# EAGLE board Ubo_v1.6_led_topview (EAGLE 9.6.2), part 1 of 2
REV: B
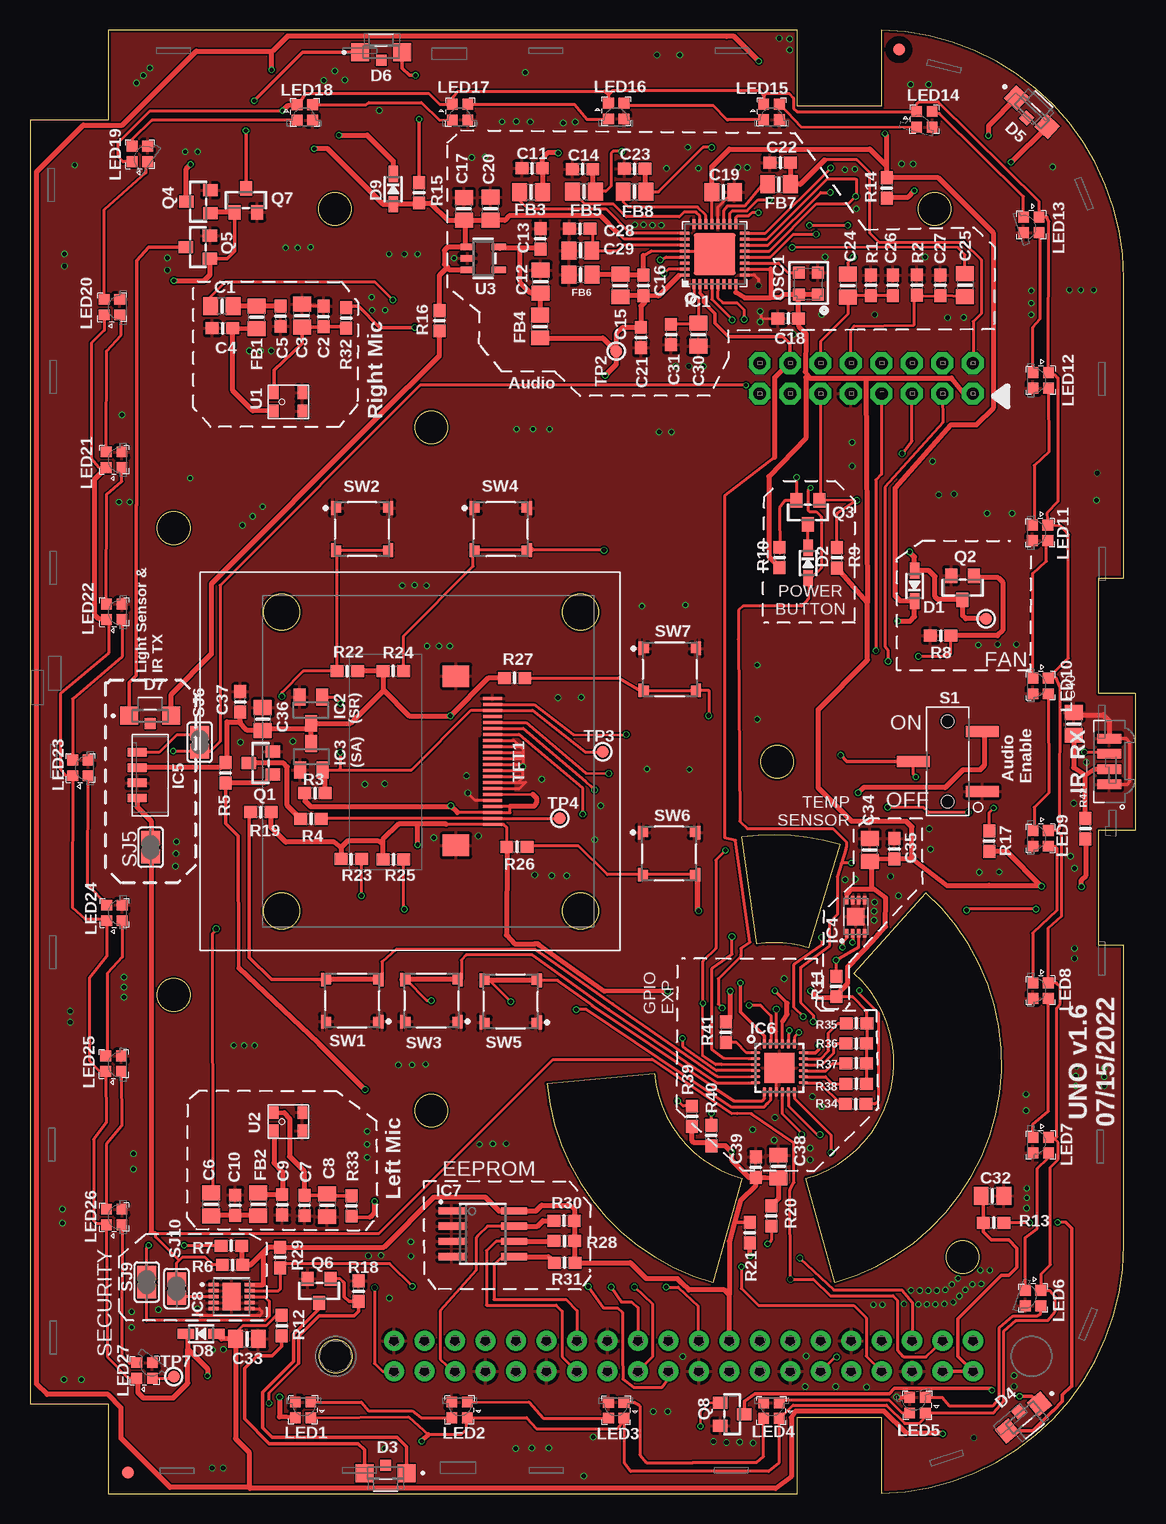
[diagram p0: board, top side]
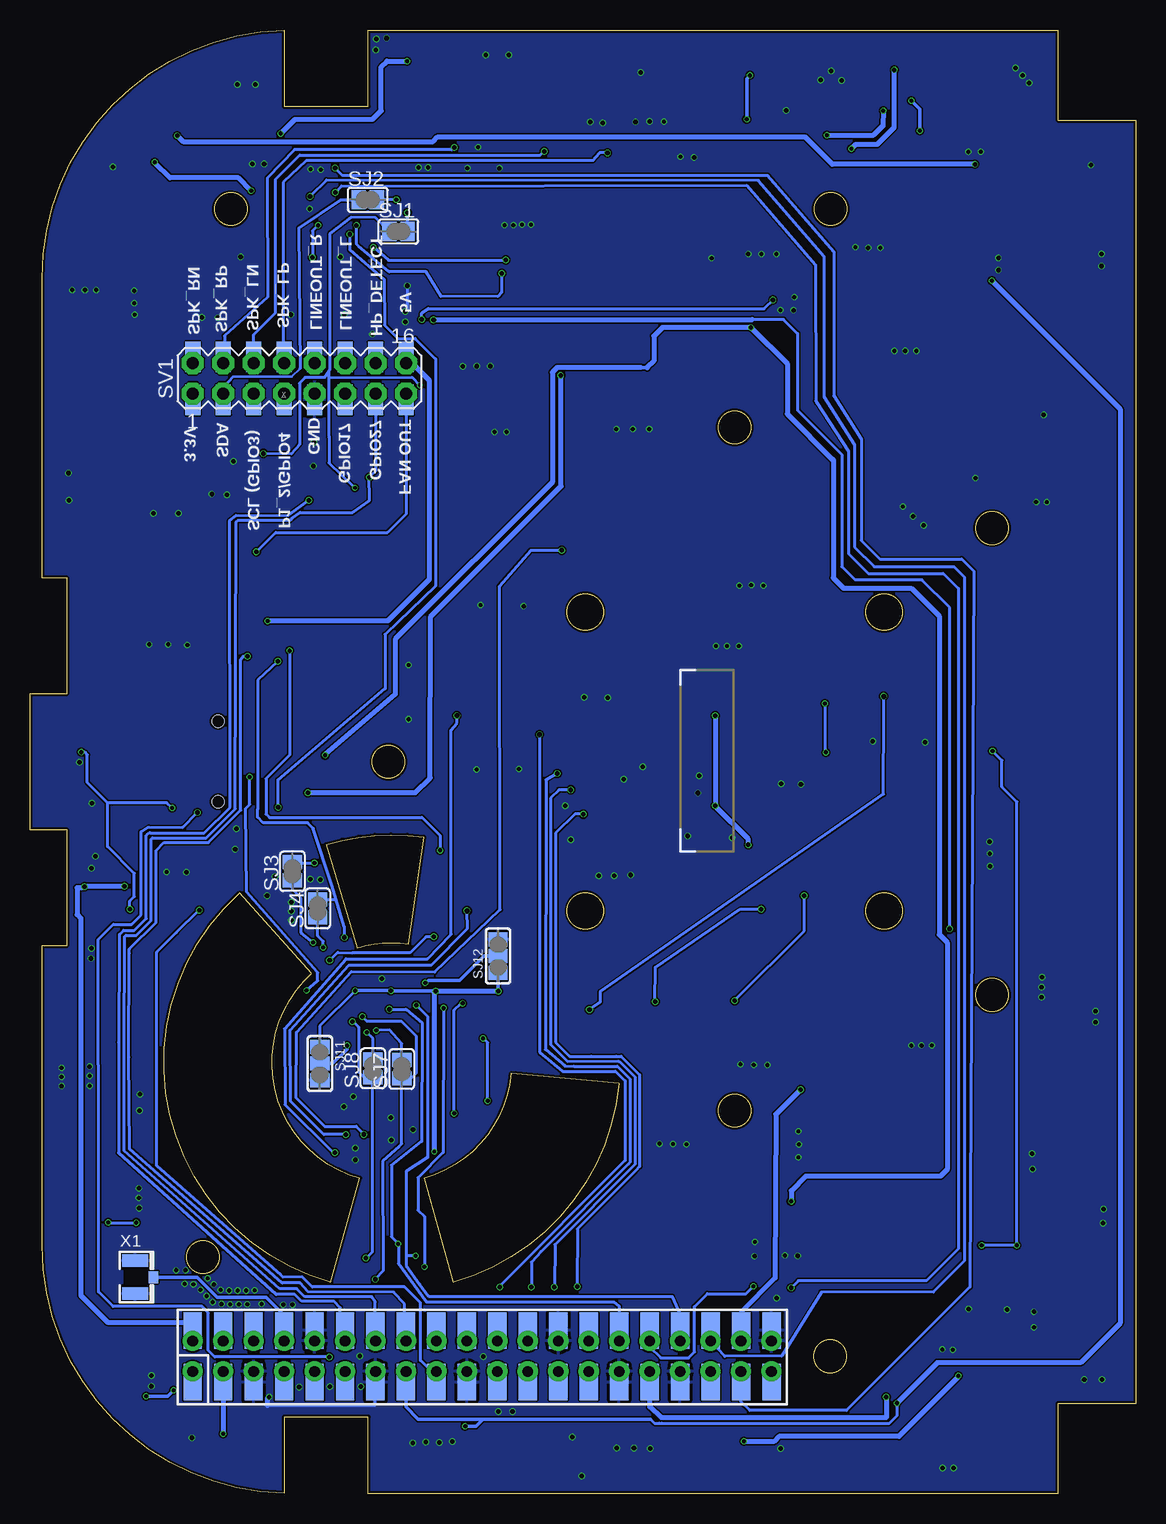
[diagram p1: board, bottom side, seen from below]

Size 92.19 x 122 mm. Coordinates in mm from the lower left corner, seen from the top.
Outline: 43.1,34.18 arc69 56.93,17.6 59.34,26.27 arc-69 52.06,35 43.1,34.18
Outline: 64.7,26.27 arc123 68.69,43.36 74.7,50.06 arc-123 67.11,17.6 64.7,26.27
Outline: 60.61,45.81 59.34,54.72 arc-25 67.5,54.1 64.91,45.48 arc25 60.61,45.81
Outline: 6.5,0 63.99,0 63.99,6.37 70.99,6.37 70.99,0.01 arc89 91.19,20.7 91.19,45.7 89.09,45.7 89.09,55.3 92.19,55.3 92.19,66.7 89.09,66.7 89.09,76.3 91.19,76.3 91.19,101.3 arc89 70.99,121.99 70.99,115.63 63.99,115.63 63.99,122 6.5,122 6.5,114.5 0,114.5 0,7.5 6.5,7.5 6.5,0
Outline: circle at 20.98,48.56 radius 1.5
Outline: circle at 20.98,73.48 radius 1.5
Outline: circle at 45.9,73.48 radius 1.5
Outline: circle at 25.43,107.07 radius 1.35
Outline: circle at 33.44,31.91 radius 1.35
Outline: circle at 11.98,41.56 radius 1.35
Outline: circle at 77.76,19.7 radius 1.35
Outline: circle at 62.3,61 radius 1.35
Outline: circle at 45.9,48.56 radius 1.5
Outline: circle at 33.44,88.88 radius 1.35
Outline: circle at 75.43,107.07 radius 1.35
Outline: circle at 11.98,80.48 radius 1.35
Outline: circle at 25.48,11.43 radius 1.36
Copper layers (1*16): Top 0.035mm / dielectric 1.6mm / Bottom 0.035mm
Design rules "jlcpcb-2layers *": minimum track width 5mil, minimum drill 0.3mm, track to track 5mil, track to pad 5mil, pad to pad 5mil, via to via 5mil, smd to smd 5mil, copper to edge 0.2mm, drill to drill 6mil, minimum pad ring 10mil, minimum via ring 3mil, stop-mask expansion 4mil, vias tented up to drill 0mil, thermal gap 10mil
Net classes: 1 power: width 0.406 mm; 2 i2c: width 0.203 mm

## Footprints (pad centres in the part's own frame; a part is rotated, then mirrored left to right if it is on the bottom)
0805-NO = smd 1.24 x 1.5: 1 -0.95,0; 2 0.95,0
0603-NO = smd 1.075 x 1: 1 -0.85,0; 2 0.85,0
SOD-323 = smd 1.35 x 0.8: A 1.27,0; C -1.27,0
DIO_VSMB10940 = smd 0.9 x 0.9: 1 0,-0.65 | smd 1.5 x 1.5: A 1.75,0; C -1.75,0
FIDUCIAL_1MM = smd 1 x 1: 1 0,0
QFN32_5MM = smd 0.8 x 0.25: 1 -2.5,1.75; 2 -2.5,1.25; 3 -2.5,0.75; 4 -2.5,0.25; 5 -2.5,-0.25; 6 -2.5,-0.75; 7 -2.5,-1.25; 8 -2.5,-1.75; 17 2.5,-1.75; 18 2.5,-1.25; 19 2.5,-0.75; 20 2.5,-0.25; 21 2.5,0.25; 22 2.5,0.75; 23 2.5,1.25; 24 2.5,1.75 | smd 0.25 x 0.8: 9 -1.75,-2.5; 10 -1.25,-2.5; 11 -0.75,-2.5; 12 -0.25,-2.5; 13 0.25,-2.5; 14 0.75,-2.5; 15 1.25,-2.5; 16 1.75,-2.5; 25 1.75,2.5; 26 1.25,2.5; 27 0.75,2.5; 28 0.25,2.5; 29 -0.25,2.5; 30 -0.75,2.5; 31 -1.25,2.5; 32 -1.75,2.5 | smd 3.5 x 3.5: 33 0,0
SOT23 = smd 1 x 1.4: 1 -0.95,-1.1; 2 0.95,-1.1; 3 0,1.1
SON127P600X800X80-9N = smd 0.699 x 0.254: P$1 -1.422,0.75; P$2 -1.422,0.25; P$3 -1.422,-0.25; P$4 -1.422,-0.75; P$5 1.333,-0.75; P$6 1.333,-0.25; P$7 1.333,0.25; P$8 1.333,0.75 | smd 1.473 x 1.473: P$9 -0.048,0
VEML7700 = smd 0.7 x 1.6: 1 -1.905,-1.1; 2 -0.635,-1.1; 3 0.635,-1.1; 4 1.905,-1.1
QFN24_4MM_SMSC = smd 0.8 x 0.28: 1 -2,1.25; 2 -2,0.75; 3 -2,0.25; 4 -2,-0.25; 5 -2,-0.75; 6 -2,-1.25; 13 2,-1.25; 14 2,-0.75; 15 2,-0.25; 16 2,0.25; 17 2,0.75; 18 2,1.25 | smd 0.28 x 0.8: 7 -1.25,-2; 8 -0.75,-2; 9 -0.25,-2; 10 0.25,-2; 11 0.75,-2; 12 1.25,-2; 19 1.25,2; 20 0.75,2; 21 0.25,2; 22 -0.25,2; 23 -0.75,2; 24 -1.25,2 | smd 2.5 x 2.5: THERM 0,0
SOIC127P600X175-8N = smd 2.2 x 0.6: 1 -2.6,1.905; 2 -2.6,0.635; 3 -2.6,-0.635; 4 -2.6,-1.905; 5 2.6,-1.905; 6 2.6,-0.635; 7 2.6,0.635; 8 2.6,1.905
SON50P300X300X60-11N = smd 0.9 x 0.27: 1 -1.5,1; 2 -1.5,0.5; 3 -1.5,0; 4 -1.5,-0.5; 5 -1.5,-1; 6 1.5,-1; 7 1.5,-0.5; 8 1.5,0; 9 1.5,0.5 | smd 0.91 x 0.27: 10 1.5,1 | smd 1.5 x 2.3: 11 0,0
TSMP77000 = smd 0.8 x 2: P$1 -1.905,0; P$2 -0.635,0; P$3 0.635,0; P$4 1.905,0
SK6805-EC15 = smd 0.9 x 0.9: P$1 -0.65,-0.65; P$2 0.65,-0.65; P$3 0.65,0.65; P$4 -0.65,0.65
OSC_2.5X2MM = smd 1 x 1: 1 -0.925,-0.8; 2 0.925,-0.8; 3 0.925,0.8; 4 -0.925,0.8
SOT23-WIDE = smd 1 x 1.2: 1 -0.95,-1; 2 0.95,-1; 3 0,1
PI_PIN_2X20_SMTTHM = drill 0.9 pad 1.676: 1 -23.38,-0.84; 2 -23.38,1.7; 3 -20.84,-0.84; 4 -20.84,1.7; 5 -18.3,-0.84; 6 -18.3,1.7; 7 -15.76,-0.84; 8 -15.76,1.7; 9 -13.22,-0.84; 10 -13.22,1.7; 11 -10.68,-0.84; 12 -10.68,1.7; 13 -8.14,-0.84; 14 -8.14,1.7; 15 -5.6,-0.84; 16 -5.6,1.7; 17 -3.06,-0.84; 18 -3.06,1.7; 19 -0.52,-0.84; 20 -0.52,1.7; 21 2.02,-0.84; 22 2.02,1.7; 23 4.56,-0.84; 24 4.56,1.7; 25 7.1,-0.84; 26 7.1,1.7; 27 9.64,-0.84; 28 9.64,1.7; 29 12.18,-0.84; 30 12.18,1.7; 31 14.72,-0.84; 32 14.72,1.7; 33 17.26,-0.84; 34 17.26,1.7; 35 19.8,-0.84; 36 19.8,1.7; 37 22.34,-0.84; 38 22.34,1.7; 39 24.88,-0.84; 40 24.88,1.7 | smd 1.524 x 3.048 bottom: S1 -23.38,-1.721; S2 -23.38,2.597; S3 -20.84,-1.721; S4 -20.84,2.597; S5 -18.3,-1.721; S6 -18.3,2.597; S7 -15.76,-1.721; S8 -15.76,2.597; S9 -13.22,-1.721; S10 -13.22,2.597; S11 -10.68,-1.721; S12 -10.68,2.597; S13 -8.14,-1.721; S14 -8.14,2.597; S15 -5.6,-1.721; S16 -5.6,2.597; S17 -3.06,-1.721; S18 -3.06,2.597; S19 -0.52,-1.721; S20 -0.52,2.597; S21 2.02,-1.721; S22 2.02,2.597; S23 4.56,-1.721; S24 4.56,2.597; S25 7.1,-1.721; S26 7.1,2.597; S27 9.64,-1.721; S28 9.64,2.597; S29 12.18,-1.721; S30 12.18,2.597; S31 14.72,-1.721; S32 14.72,2.597; S33 17.26,-1.721; S34 17.26,2.597; S35 19.8,-1.721; S36 19.8,2.597; S37 22.34,-1.721; S38 22.34,2.597; S39 24.88,-1.721; S40 24.88,2.597
SW_MS-12D17E = smd 0.9 x 2.75: 1 -2.5,-2.875; 2 0,2.875; 3 2.5,-2.875 | hole 1: 3.35,0; -3.35,0
SJ = smd 1.168 x 1.6: 1 -0.762,0; 2 0.762,0
SOLDERJUMPER_2WAY_OPEN_NOPASTE = smd 1.168 x 1.6: 1 -1.397,0; 2 0,0; 3 1.397,0
MA08-2 = drill 1.016 octagon: 1 -8.89,-1.27; 2 -8.89,1.27; 3 -6.35,-1.27; 4 -6.35,1.27; 5 -3.81,-1.27; 6 -3.81,1.27; 7 -1.27,-1.27; 8 -1.27,1.27; 9 1.27,-1.27; 10 1.27,1.27; 11 3.81,-1.27; 12 3.81,1.27; 13 6.35,-1.27; 14 6.35,1.27; 15 8.89,-1.27; 16 8.89,1.27 | smd 1.27 x 2.54: P$1 -8.89,-1.778; P$2 -8.89,1.778; P$3 -6.35,-1.778; P$4 -6.35,1.778; P$5 -3.81,-1.778; P$6 -3.81,1.778; P$7 -1.27,-1.778; P$8 -1.27,1.778; P$9 1.27,-1.778; P$10 1.27,1.778; P$11 3.81,-1.778; P$12 3.81,1.778; P$13 6.35,-1.778; P$14 6.35,1.778; P$15 8.89,-1.778; P$16 8.89,1.778
E-SWITCH_TL3315NF160Q_0 = smd 0.762 x 0.762: 1 -2.125,1.75; 2 2.125,1.75; 3 -2.125,-1.75; 4 2.125,-1.75 | smd 0.254 x 1.143: 1-2 -2.475,1.75; 2-2 2.475,1.75; 3-2 -2.475,-1.75; 4-2 2.475,-1.75
TFT_1.54IN_240X240_22PN_TOP_FPC = smd 0.25 x 1.6: 1 5.25,5.222; 2 4.75,5.222; 3 4.25,5.222; 4 3.75,5.222; 5 3.25,5.222; 6 2.75,5.222; 7 2.25,5.222; 8 1.75,5.222; 9 1.25,5.222; 10 0.75,5.222; 11 0.25,5.222; 12 -0.25,5.222; 13 -0.75,5.222; 14 -1.25,5.222; 15 -1.75,5.222; 16 -2.25,5.222; 17 -2.75,5.222; 18 -3.25,5.222; 19 -3.75,5.222; 20 -4.25,5.222; 21 -4.75,5.222; 22 -5.25,5.222 | smd 1.8 x 2.2: SUPPORT1 7,2.172; SUPPORT2 -7.1,2.172
TESTPOINT_ROUND_1MM = smd 1 x 1: P$1 0,0
SPW2430HR5H-B = smd 1.067 x 0.813: 1 -0.762,1.194; 2 -0.762,-1.168; 3 0.762,-1.168; 4 0.762,1.194
SOT23-5 = smd 0.55 x 1.2: 1 -0.95,-1.3; 2 0,-1.3; 3 0.95,-1.3; 4 0.95,1.3; 5 -0.95,1.3
U.FL = smd 2.2 x 1.05: 1 0,1.375; 2 0,-1.375 | smd 0.8 x 1: 3 1.525,0

## Placement (x,y rotation side)
C1  10uF  [0805-NO]  16,98.97 180 top
C2  0.1uF  [0603-NO]  24.46,98.12 90 top
C3  10uF  [0805-NO]  22.67,98.18 90 top
C4  33pF  [0603-NO]  16.05,97.13 180 top
C5  33pF  [0603-NO]  20.88,98.15 270 top
C6  10uF  [0805-NO]  15.1,24.1 90 top
C7  0.1uF  [0603-NO]  22.89,24.02 270 top
C8  10uF  [0805-NO]  24.77,24.03 270 top
C9  33pF  [0603-NO]  21.03,24.07 270 top
C10  33pF  [0603-NO]  17.11,24.03 90 top
C11  100pF  [0603-NO]  41.86,110.46 180 top
C12  10uF  [0805-NO]  42.58,101.03 90 top
C13  0.1uF  [0603-NO]  42.56,104.58 90 top
C14  100pF  [0603-NO]  46.06,110.4 180 top
C15  10uF  [0805-NO]  49.21,100.7 90 top
C16  0.1uF  [0603-NO]  51.14,100.7 90 top
C17  10uF  [0805-NO]  36.17,107.09 90 top
C18  0.1uF  [0603-NO]  63.22,97.94 180 top
C19  10uF  [0805-NO]  57.8,108.5 0 top
C20  10uF  [0805-NO]  38.39,107.1 90 top
C21  0.1uF  [0603-NO]  50.94,96.35 270 top
C22  100pF  [0603-NO]  62.55,110.93 180 top
C23  100pF  [0603-NO]  50.41,110.43 180 top
C24  47uF  [0805-NO]  68.17,100.69 270 top
C25  47uF  [0805-NO]  77.95,100.74 270 top
C26  100pF  [0603-NO]  71.93,100.71 90 top
C27  100pF  [0603-NO]  75.9,100.71 90 top
C28  0.1uF  [0603-NO]  45.83,105.42 180 top
C29  10uF  [0805-NO]  45.89,103.62 180 top
C30  10uF  [0805-NO]  55.71,96.61 270 top
C31  0.1uF  [0603-NO]  53.45,96.61 270 top
C32  10uF  [0805-NO]  80.24,24.8 0 top
C33  10uF  [0805-NO]  18.09,12.88 0 top
C34  10uF  [0805-NO]  70,53.64 90 top
C35  0.1uF  [0603-NO]  72.06,53.75 90 top
C36  10uF  [0805-NO]  19.41,64.57 90 top
C37  0.1uF  [0603-NO]  17.53,65.99 90 top
C38  10uF  [0805-NO]  62.41,27.25 90 top
C39  0.1uF  [0603-NO]  60.5,27.2 90 top
C40  10uF  [0805-NO]  87.02,64.16 90 top
D1  1N4148  [SOD-323]  73.75,75.67 90 top
D2  1N4148  [SOD-323]  64.87,77.57 270 top
D3  VSMB10940  [DIO_VSMB10940]  29.64,1.7 180 top
D4  VSMB10940  [DIO_VSMB10940]  82.82,6.34 220 top
D5  VSMB10940  [DIO_VSMB10940]  83.53,115.15 317 top
D6  VSMB10940  [DIO_VSMB10940]  29.29,120.13 0 top
D7  VSMB10940  [DIO_VSMB10940]  10.03,64.83 0 top
D8  1N4148  [SOD-323]  14.27,13.31 0 top
D9  1N4148  [SOD-323]  30.28,108.74 270 top
FB1  Ferrite  [0805-NO]  18.9,98.04 90 top
FB2  Ferrite  [0805-NO]  19.04,24.12 270 top
FB3  Ferrite  [0805-NO]  41.77,108.5 0 top
FB4  Ferrite  [0805-NO]  42.53,97.28 90 top
FB5  Ferrite  [0805-NO]  46.19,108.52 0 top
FB6  Ferrite  [0805-NO]  45.9,101.61 180 top
FB7  Ferrite  [0805-NO]  62.45,109.13 0 top
FB8  Ferrite  [0805-NO]  50.41,108.51 0 top
FID1  FIDUCIAL_1MM  [FIDUCIAL_1MM]  72.44,120.36 180 top
FID2  FIDUCIAL_1MM  [FIDUCIAL_1MM]  8.15,1.73 180 top
IC1  WM8960  [QFN32_5MM]  57.09,103.31 90 top
IC2  APX803-SAG  [SOT23]  23.42,65.3 180 top
IC3  APX803-SAG  [SOT23]  23.46,61.42 0 top
IC4  PCT2075D8-HWSON  [SON127P600X800X80-9N]  68.83,48.13 90 top
IC5  VEML7700  [VEML7700]  10.03,59.88 270 top
IC6  AW9523  [QFN24_4MM_SMSC]  62.48,35.5 0 top
IC7  CAT24C32WI-GT3  [SOIC127P600X175-8N]  37.76,21.65 0 top
IC8  SLS32AIA020X2USON10XTMA4  [SON50P300X300X60-11N]  16.81,16.41 0 top
IR1  [TSMP77000]  89.97,61.02 90 top
LED1  LC8812B-3210  [SK6805-EC15]  22.77,6.97 0 top
LED2  LC8812B-3210  [SK6805-EC15]  35.81,6.97 0 top
LED3  LC8812B-3210  [SK6805-EC15]  48.87,6.94 0 top
LED4  LC8812B-3210  [SK6805-EC15]  61.81,6.92 0 top
LED5  LC8812B-3210  [SK6805-EC15]  73.99,7.37 0 top
LED6  LC8812B-3210  [SK6805-EC15]  83.63,16.29 90 top
LED7  LC8812B-3210  [SK6805-EC15]  84.26,29.04 90 top
LED8  LC8812B-3210  [SK6805-EC15]  84.25,41.92 90 top
LED9  LC8812B-3210  [SK6805-EC15]  84.25,54.61 90 top
LED10  LC8812B-3210  [SK6805-EC15]  84.25,67.32 90 top
LED11  LC8812B-3210  [SK6805-EC15]  84.21,80.09 90 top
LED12  LC8812B-3210  [SK6805-EC15]  84.26,92.79 90 top
LED13  LC8812B-3210  [SK6805-EC15]  83.48,105.75 90 top
LED14  LC8812B-3210  [SK6805-EC15]  74.56,114.55 180 top
LED15  LC8812B-3210  [SK6805-EC15]  61.82,115.16 180 top
LED16  LC8812B-3210  [SK6805-EC15]  48.87,115.24 180 top
LED17  LC8812B-3210  [SK6805-EC15]  35.85,115.15 180 top
LED18  LC8812B-3210  [SK6805-EC15]  22.91,115.13 180 top
LED19  LC8812B-3210  [SK6805-EC15]  9.17,111.66 270 top
LED20  LC8812B-3210  [SK6805-EC15]  6.83,98.89 270 top
LED21  LC8812B-3210  [SK6805-EC15]  7.01,86.18 270 top
LED22  LC8812B-3210  [SK6805-EC15]  7.02,73.49 270 top
LED23  LC8812B-3210  [SK6805-EC15]  4.2,60.49 270 top
LED24  LC8812B-3210  [SK6805-EC15]  7.04,48.4 270 top
LED25  LC8812B-3210  [SK6805-EC15]  6.97,35.83 270 top
LED26  LC8812B-3210  [SK6805-EC15]  7.02,23.05 270 top
LED27  LC8812B-3210  [SK6805-EC15]  9.55,10.26 270 top
OSC1  ECS-3225MV  [OSC_2.5X2MM]  64.9,100.86 90 top
Q1  BSS138  [SOT23-WIDE]  19.24,60.88 90 top
Q2  BSS138  [SOT23-WIDE]  77.75,75.51 180 top
Q3  BSS138  [SOT23-WIDE]  64.85,81.79 180 top
Q4  BSS138  [SOT23-WIDE]  14.03,107.68 90 top
Q5  BSS138  [SOT23-WIDE]  14,103.9 90 top
Q6  BSS138  [SOT23-WIDE]  24.1,16.9 180 top
Q7  BSS138  [SOT23-WIDE]  18,107.8 0 top
Q8  BSS138  [SOT23-WIDE]  58.55,6.6 270 top
R1  10K  [0603-NO]  70.1,100.71 270 top
R2  10K  [0603-NO]  73.94,100.74 270 top
R3  10K  [0603-NO]  23.76,58.38 180 top
R4  20  [0603-NO]  23.42,56.24 0 top
R5  10K  [0603-NO]  16.31,60.07 90 top
R6  10K  [0603-NO]  16.89,19.05 180 top
R7  10K  [0603-NO]  16.79,20.65 180 top
R8  10K  [0603-NO]  75.92,71.51 180 top
R9  10K  [0603-NO]  67.28,78 90 top
R10  10K  [0603-NO]  62.48,78.03 90 top
R11  10K  [0603-NO]  67.22,42.27 90 top
R12  20  [0603-NO]  20.99,14 270 top
R13  20  [0603-NO]  80.34,22.58 0 top
R14  20  [0603-NO]  71.42,108.83 270 top
R15  20  [0603-NO]  32.44,108.43 90 top
R16  20  [0603-NO]  34.14,97.76 270 top
R17  10K  [0603-NO]  79.96,54.38 90 top
R18  10K  [0603-NO]  27.39,16.87 90 top
R19  10K  [0603-NO]  19.24,56.81 180 top
R20  10K  [0603-NO]  61.8,23.14 270 top
R21  10K  [0603-NO]  60.01,21.74 270 top
R22  10K  [0603-NO]  26.45,68.55 180 top
R23  10K  [0603-NO]  26.78,52.88 0 top
R24  10K  [0603-NO]  30.29,68.57 0 top
R25  10K  [0603-NO]  30.3,52.86 0 top
R26  10K  [0603-NO]  40.6,53.91 0 top
R27  10K  [0603-NO]  40.4,68 0 top
R28  3.9K  [0603-NO]  44.55,21.06 180 top
R29  10K  [0603-NO]  20.85,19.67 270 top
R30  10K  [0603-NO]  44.53,22.75 180 top
R31  3.9K  [0603-NO]  44.58,19.24 180 top
R32  20  [0603-NO]  26.37,97.99 90 top
R33  20  [0603-NO]  26.8,23.98 270 top
R34  10K  [0603-NO]  68.83,32.46 0 top
R35  10K  [0603-NO]  68.91,39.19 180 top
R36  10K  [0603-NO]  68.88,37.52 180 top
R37  10K  [0603-NO]  68.88,35.86 180 top
R38  10K  [0603-NO]  68.88,34.16 180 top
R39  10K  [0603-NO]  55.19,31.45 90 top
R40  10K  [0603-NO]  56.79,29.84 90 top
R41  10K  [0603-NO]  58.01,38.46 270 top
R42  20  [0603-NO]  87.99,55.42 90 top
RPI1  RASPBERRYPI_BPLUS_PIN_2X20_SMTTHM  [PI_PIN_2X20_SMTTHM]  55.24,11.87 180 top
S1  JS102011JCQNMS-12D17E  [SW_MS-12D17E]  76.5,61.02 90 top
SJ1  [SJ]  61.47,105.21 0 bottom
SJ2  [SJ]  64.03,107.85 0 bottom
SJ3  [SJ]  70.31,51.87 90 bottom
SJ4  [SJ]  68.2,48.77 90 bottom
SJ5  [SJ]  10.06,53.87 90 top
SJ6  [SJ]  14.15,62.64 90 top
SJ7  [SJ]  61.19,35.38 90 bottom
SJ8  [SJ]  63.6,35.43 90 bottom
SJ9  [SJ]  9.73,17.63 270 top
SJ10  [SJ]  12.22,17.09 270 top
SJ11  [SOLDERJUMPER_2WAY_OPEN_NOPASTE]  68.02,35.84 270 bottom
SJ12  [SOLDERJUMPER_2WAY_OPEN_NOPASTE]  53.16,44.81 90 bottom
SV1  [MA08-2]  69.72,92.96 0 bottom
SW1  [E-SWITCH_TL3315NF160Q_0]  26.86,41.08 180 top
SW2  [E-SWITCH_TL3315NF160Q_0]  27.69,80.39 0 top
SW3  [E-SWITCH_TL3315NF160Q_0]  33.46,41.08 180 top
SW4  [E-SWITCH_TL3315NF160Q_0]  39.24,80.39 0 top
SW5  [E-SWITCH_TL3315NF160Q_0]  40.07,41.02 180 top
SW6  [E-SWITCH_TL3315NF160Q_0]  53.28,53.34 0 top
SW7  [E-SWITCH_TL3315NF160Q_0]  53.34,68.71 0 top
TFT1  DISP_TFT_1.54IN_240X240_22P_TOP_FPC  [TFT_1.54IN_240X240_22PN_TOP_FPC]  33.34,61.04 270 top
TP2  [TESTPOINT_ROUND_1MM]  48.87,95.22 0 top
TP3  [TESTPOINT_ROUND_1MM]  47.75,61.82 0 top
TP4  [TESTPOINT_ROUND_1MM]  44.17,56.29 0 top
TP6  [TESTPOINT_ROUND_1MM]  79.71,72.92 180 top
TP7  [TESTPOINT_ROUND_1MM]  11.99,9.75 0 top
U1  MIC  [SPW2430HR5H-B]  21.54,91.01 90 top
U2  MIC  [SPW2430HR5H-B]  21.54,30.99 90 top
U3  AP2112-3.3K  [SOT23-5]  37.78,102.96 270 top
X1  [U.FL]  83.41,18.03 0 bottom

## Library data of the parts
C1-C40 FB1-FB8 IC2 IR1 LED1-LED27 OSC1 Q1-Q8 R1-R42 RPI1 S1 SJ1-SJ12 TFT1 TP2-TP4 TP6 TP7 = Uno
D1 D2 D8 D9 = Uno; PURCHASE_URL: https://www.digikey.com/en/products/detail/diodes-incorporated/ZLLS410TA/1767180
D3-D7 = Uno; AVAILABILITY: Warning; DESCRIPTION: LED IrLED 940nm 2-Pin SMD T/R; MF: Vishay Semiconductor; MP: VSMB10940; PACKAGE: SMD-2 Vishay; PRICE: None; PURCHASE-URL: https://www.digikey.com/en/products/detail/vishay-semiconductor-opto-division/VSMB10940/3915199
FID1 FID2 = Uno; BOM: EXCLUDE
IC1 = Uno; AVAILABILITY: low; DATASHEET: https://statics.cirrus.com/pubs/proDatasheet/WM8960_v4.4.pdf; DIGIKEY_PART_NUMBER: 598-WM8960CGEFL/V-ND; MF: Cirrus Logic Inc.; MFN: WM8960CGEFL/V; PACKAGE: 32-VFQFN Exposed Pad; PRICE: 0.9; PURCHASE_URL: https://www.digikey.com/en/products/detail/cirrus-logic-inc/WM8960CGEFL-V/5036712; ROHS: yes; TEMPERATURE_RANGE_HIGH: 85°C; TEMPERATURE_RANGE_LOW: -40°C
IC3 = Uno; AVAILABILITY: medium; DATASHEET: https://www.diodes.com/assets/Datasheets/APX803S.pdf; DIGIKEY_PART_NUMBER: APX803S00-29SR-7DIDKR-ND; MF: Diodes Incorporated; MPN: APX803S00-29SR-7; PACKAGE: SOT-23-3; PRICE: 0.10; PURCHASE-URL: https://www.digikey.com/en/products/detail/diodes-incorporated/APX803S00-29SR-7/6674547; ROHS: yes
IC4 = Uno; AVAILABILITY: medium; DATASHEET: https://www.nxp.com/docs/en/data-sheet/PCT2075.pdf; DIGIKEY_PART_NUMBER: 568-10220-6-ND; MF: NXP USA Inc.; MFN: PCT2075TP,147; PACKAGE: 8HWSON; PURCHASE_URL: https://www.digikey.com/en/products/detail/PCT2075TP%2c147/568-10220-1-ND/3991876?itemSeq=362201509; ROHS: yes; TEMPERATURE_RANGE_HIGH: 125°C; TEMPERATURE_RANGE_LOW: -55°C
IC5 = Uno; DATASHEET: https://www.nxp.com/docs/en/data-sheet/PCT2075.pdf; DIGIKEY_PART_NUMBER: VEML7700DKR-ND; MF: Vishay; MPN: VEML7700-TR; PACKAGE: 4-SMD; PRICE: 0.4; PURCHASE-URL: https://www.digikey.com/en/products/detail/vishay-semiconductor-opto-division/VEML7700-TR/5820243; ROHS: yes; TEMPERATURE_RANGE_HIGH: 85°C; TEMPERATURE_RANGE_LOW: -25°C
IC6 = Uno; AVAILABILITY: warning; DATASHEET: https://datasheet.lcsc.com/lcsc/1809192237_AWINIC-Shanghai-Awinic-Tech-AW9523BTQR_C148077.pdf; MF: AWINIC(Shanghai Awinic Tech); MFN: AW9523BTQR; PACKAGE: TQFN-24; PRICE: 0.3; PURCHASE_LINK: https://lcsc.com/product-detail/Interface-I-O-Expanders_AWINIC-Shanghai-Awinic-Tech-AW9523BTQR_C148077.html; TEMPERATURE_RANGE_HIGH: 85℃; TEMPERATURE_RANGE_LOW: -40℃
IC7 = Uno; AVAILABILITY: Good; DATASHEET: https://www.onsemi.com/pdf/datasheet/cat24c32-d.pdf; DESCRIPTION: EEPROM Memory IC 32Kb (4K x 8) I²C 1MHz 400ns 8-SOIC; DIGIKEY_PART_NUMBER: CAT24C32WI-GT3DKR-ND; MF: ON; MPN: CAT24C32WI-GT3; PACKAGE: SOIC-8 ON; PRICE: 0.1; PURCHASE-URL: https://www.digikey.com/en/products/detail/on-semiconductor/CAT24C32WI-GT3/1631159; ROHS: yes; SPICEPREFIX: X; TEMPERATURE_RANGE_HIGH: 85°C; TEMPERATURE_RANGE_LOW: -40°C
IC8 = Uno; AVAILABILITY: Good; DESCRIPTION: High-end security controller | Turnkey solution | One-way authentication using ECDSA | Mutual authentication using DTLS client (IETF standard RFC 6347) | Secure communication using DTLS | Compliant with the USB Type-C Authentication standard | I2C interface | Up to 10 KB user memory | Cryptographic support: ECC256, AES128, SHA-256, TRNG, DRNG | PG-USON-10-2 package (3 x 3 mm) | Standard & extended temperature ranges | Full system integration support | Common Criteria Certified EAL6+ (high) hardware | Cryptographic Tool Box based on ECC NIST P256, P384 and SHA256 (sign, verify, key generation, ECDH, session key derivation); MF: Infineon Technologies; MP: SLS32AIA020X2USON10XTMA4; PACKAGE: UFDFN-10 Infineon Technologies; PRICE: None; PURCHASE-URL: https://pricing.snapeda.com/search/part/SLS32AIA020X2USON10XTMA4/?ref=eda
SV1 = Uno; OC_FARNELL: unknown; OC_NEWARK: unknown
SW1-SW7 = Uno; CENTROID_NOT_SPECIFIED: No; DATASHEET: http://media.digikey.com/pdf/Data%20Sheets/E-Switch%20PDFs/TL3315.pdf; DIGIKEY_PART_NUMBER: EG4621CT-ND; MF: E-Switch; MOUSER_PART_NUMBER: 612-TL3315NF160Q; MPN: TL3315NF160Q; PACKAGE: SW_SMT_4MM5_4MM5; PREFIX: SW; PRICE: 0.02; PURCHASE-URL: https://www.digikey.sg/product-detail/en/e-switch/TL3315NF160Q/EG4621CT-ND/1870401; ROHS: yes; TEMPERATURE_RANGE_HIGH: +70°C; TEMPERATURE_RANGE_LOW: -20°C
U1 U2 = Uno; AVAILABILITY: good; DATASHEET: https://www.knowles.com/docs/default-source/model-downloads/spw2430hr5h-b.pdf; DIGIKEY_PART_NUMBER: 423-1394-2-ND; MN: Knowles; MPN: SPW2430HR5H-B; PRICE: 0.25; PURCHASE-URL: https://www.digikey.com/en/products/detail/knowles/SPW2430HR5H-B/5052768; ROHS: yes
U3 = Uno; DIGIKEY_PART_NUMBER: MCP1824T-3302E/OTCT-ND
X1 = adafruit

## Nets
3.3V: C18.1 C34.1 C35.1 C36.1 C37.1 C38.1 C39.1 IC1.8 IC1.10 IC2.3 IC3.3 IC4.P$8 IC5.2 IC6.21 IC7.8 IC8.10 OSC1.1 OSC1.4 R3.2 R5.2 R6.1 R7.1 R9.1 R10.1 R11.1 R17.1 R19.1 R20.1 R21.1 R22.1 R23.1 R24.1 R25.1 R26.1 R27.1 R28.1 R29.1 R30.1 R31.1 R35.1 R36.1 R37.1 R38.1 R39.1 R40.1 R41.1 R42.1 RPI1.1 RPI1.17 RPI1.S1 RPI1.S17 SJ11.1 SJ12.1 SV1.1 SV1.P$1 TFT1.1 TFT1.3 TFT1.4 TFT1.6
5.0V: C17.1 C19.1 C20.1 C32.1 C33.1 D1.C D8.A D9.A IC1.21 IC1.26 R12.1 R13.1 R14.1 R15.1 R16.1 RPI1.2 RPI1.4 RPI1.S2 RPI1.S4 SV1.16 SV1.P$16 U3.1 U3.3
AGND: C15.2 C16.2 FB6.1 IC1.28 IC1.33
AVDD: C15.1 C16.1 C21.1 FB4.1 IC1.32 S1.3 TP2.P$1
AVDD_EN: R32.2 R33.2 R34.2 S1.2
BUTTON_E_DOWN: IC6.10 R24.2 SW4.3 SW4.3-2 SW4.4 SW4.4-2
BUTTON_E_UP: IC6.8 R22.2 SW2.3 SW2.3-2 SW2.4 SW2.4-2
BUTTON_S_LEFT: IC6.11 R26.2 SW6.3 SW6.3-2 SW6.4 SW6.4-2
BUTTON_S_RIGHT: IC6.12 R27.2 SW7.3 SW7.3-2 SW7.4 SW7.4-2
BUTTON_W_DOWN: IC6.7 R25.2 SW5.3 SW5.3-2 SW5.4 SW5.4-2
BUTTON_W_MIDDLE: IC6.6 R23.2 SW3.3 SW3.3-2 SW3.4 SW3.4-2
BUTTON_W_UP: IC6.5 R19.2 SW1.3 SW1.3-2 SW1.4 SW1.4-2
EECLK: IC7.6 R28.2 RPI1.28 RPI1.S28
EEDATA: IC7.5 R31.2 RPI1.27 RPI1.S27
EEPROM_WP: IC7.7 R30.2 RPI1.36 RPI1.S36
FAN_IN: Q2.1 R8.1 RPI1.15 RPI1.S15
FAN_OUT: D1.A Q2.3 SV1.15 SV1.P$15 TP6.P$1
GND: C2.2 C3.2 C4.2 C5.2 C7.2 C8.2 C9.2 C10.2 C11.2 C12.2 C13.2 C14.2 C17.2 C18.2 C19.2 C20.2 C21.2 C22.2 C23.2 C26.2 C27.2 C28.2 C29.2 C30.2 C31.2 C32.2 C33.2 C34.2 C35.2 C36.2 C37.2 C38.2 C39.2 C40.2 FB6.2 IC1.9 IC1.20 IC1.24 IC2.2 IC3.1 IC4.P$4 IC4.P$5 IC4.P$6 IC4.P$7 IC4.P$9 IC5.3 IC6.9 IC6.THERM IC7.1 IC7.2 IC7.3 IC7.4 IC8.1 IC8.2 IC8.4 IC8.5 IC8.6 IC8.7 IC8.11 IR1.P$1 IR1.P$4 LED1.P$4 LED2.P$4 LED3.P$4 LED4.P$4 LED5.P$4 LED6.P$4 LED7.P$4 LED8.P$4 LED9.P$4 LED10.P$4 LED11.P$4 LED12.P$4 LED13.P$4 LED14.P$4 LED15.P$4 LED16.P$4 LED17.P$4 LED18.P$4 LED19.P$4 LED20.P$4 LED21.P$4 LED22.P$4 LED23.P$4 LED24.P$4 LED25.P$4 LED26.P$4 LED27.P$4 OSC1.2 Q1.2 Q2.2 Q4.2 Q5.2 Q6.2 Q7.2 Q8.2 R1.1 R2.1 R8.2 R18.2 RPI1.6 RPI1.9 RPI1.14 RPI1.20 RPI1.25 RPI1.30 RPI1.34 RPI1.39 RPI1.S6 RPI1.S9 RPI1.S14 RPI1.S20 RPI1.S25 RPI1.S30 RPI1.S34 RPI1.S39 S1.1 SJ11.3 SJ12.3 SV1.9 SV1.P$9 SW1.1 SW1.1-2 SW1.2 SW1.2-2 SW2.1 SW2.1-2 SW2.2 SW2.2-2 SW3.1 SW3.1-2 SW3.2 SW3.2-2 SW4.1 SW4.1-2 SW4.2 SW4.2-2 SW5.1 SW5.1-2 SW5.2 SW5.2-2 SW6.1 SW6.1-2 SW6.2 SW6.2-2 SW7.1 SW7.1-2 SW7.2 SW7.2-2 TFT1.5 TFT1.7 TFT1.8 TFT1.9 TFT1.10 TFT1.11 TFT1.12 TFT1.13 TFT1.14 TFT1.15 TFT1.22 TFT1.SUPPORT1 TFT1.SUPPORT2 U1.2 U1.3 U2.2 U2.3 U3.2 X1.1 X1.2
GPIO4: RPI1.7 RPI1.S7 X1.3
GPIO17: Q3.1 R9.2 RPI1.11 RPI1.S11 SV1.11 SV1.P$11
GPIO27: Q3.2 R10.2 RPI1.13 RPI1.S13 SV1.13 SV1.P$13
GPIO_15: RPI1.10 RPI1.S10
GPIO_EXP_RST: IC6.23 R21.2 RPI1.33 RPI1.S33
HEADPHONE_DETECT: IC1.2 RPI1.8 RPI1.S8 SV1.14 SV1.P$14
I2S_BCLK: IC1.12 RPI1.12 RPI1.S12
I2S_DIN: IC1.16 RPI1.38 RPI1.S38
I2S_DOUT: IC1.14 RPI1.40 RPI1.S40
I2S_LRCLK: IC1.13 IC1.15 RPI1.35 RPI1.S35
INT: IC6.22 R20.2 RPI1.29 RPI1.S29
IR_RX: IR1.P$3 R17.2 RPI1.18 RPI1.S18
IR_TX: Q4.1 Q5.1 Q6.1 Q7.1 Q8.1 R18.1 RPI1.16 RPI1.S16
LED_POWER: D8.C D9.C LED1.P$2 LED2.P$2 LED3.P$2 LED4.P$2 LED5.P$2 LED6.P$2 LED7.P$2 LED8.P$2 LED9.P$2 LED10.P$2 LED11.P$2 LED12.P$2 LED13.P$2 LED14.P$2 LED15.P$2 LED16.P$2 LED17.P$2 LED18.P$2 LED19.P$2 LED20.P$2 LED21.P$2 LED22.P$2 LED23.P$2 LED24.P$2 LED25.P$2 LED26.P$2 LED27.P$2
LED_PWM0: LED1.P$1 RPI1.32 RPI1.S32
LEDK: R4.2 TFT1.2 TP4.P$1
LINEOUT_LEFT: C24.2 C26.1 R1.2 SV1.12 SV1.P$12
LINEOUT_RIGHT: C25.2 C27.1 R2.2 SV1.10 SV1.P$10
LINPUT1: C6.2 IC1.4
LITE: Q1.1 R5.1 RPI1.37 RPI1.S37
MCLK: IC1.11 OSC1.3
MICBIAS: C30.1 C31.1 IC1.1
N$1: FB7.1 IC1.19
N$2: FB8.1 IC1.22
N$3: LED27.P$3 TP7.P$1
N$4: Q1.3 R4.1
N$5: IC6.20 SJ7.2
N$6: D7.A R16.2
N$7: D3.C Q6.3
N$8: D2.C Q3.3
N$9: IC6.19 SJ8.2
N$10: IC6.4 R39.2
N$11: IC6.14 R38.2
N$12: C4.1 FB1.1 U1.1
N$13: C9.1 FB2.1 U2.1
N$14: LED1.P$3 LED2.P$1
N$15: LED2.P$3 LED3.P$1
N$16: C1.1 C5.1 FB1.2
N$17: C6.1 C10.1 FB2.2
N$18: LED3.P$3 LED4.P$1
N$19: IC6.15 R37.2
N$20: LED4.P$3 LED5.P$1
N$21: FB3.1 IC1.25
N$22: FB5.1 IC1.23
N$23: LED6.P$3 LED7.P$1
N$24: LED7.P$3 LED8.P$1
N$25: LED9.P$3 LED10.P$1
N$26: LED10.P$3 LED11.P$1
N$27: LED14.P$3 LED15.P$1
N$28: LED15.P$3 LED16.P$1
N$29: LED16.P$3 LED17.P$1
N$30: LED17.P$3 LED18.P$1
N$31: LED20.P$3 LED21.P$1
N$32: LED21.P$3 LED22.P$1
N$33: LED22.P$3 LED23.P$1
N$34: LED23.P$3 LED24.P$1
N$35: LED5.P$3 LED6.P$1
N$36: LED13.P$3 LED14.P$1
N$37: LED19.P$3 LED20.P$1
N$38: IC6.16 R36.2
N$39: LED11.P$3 LED12.P$1
N$40: LED12.P$3 LED13.P$1
N$41: LED24.P$3 LED25.P$1
N$42: LED25.P$3 LED26.P$1
N$43: C24.1 IC1.31
N$44: C25.1 IC1.29
N$45: IC6.17 R35.2
N$46: IC1.17 SJ1.2
N$47: IC1.18 SJ2.2
N$48: IC5.4 SJ5.2
N$49: IC5.1 SJ6.2
N$50: IC4.P$2 SJ3.1
N$51: IC4.P$1 SJ4.1
N$52: IC8.8 SJ9.2
N$53: IC8.3 SJ10.2
N$54: D6.A R15.2
N$55: D5.A R14.2
N$56: D4.A R13.2
N$57: D3.A R12.2
N$58: LED8.P$3 LED9.P$1
N$59: LED18.P$3 LED19.P$1
N$60: LED26.P$3 LED27.P$1
N$61: C7.1 C8.1 R33.1 U2.4
N$62: C2.1 C3.1 R32.1 U1.4
N$63: IC6.13 R34.1
N$64: IC6.24 SJ12.2
N$65: IC6.18 SJ11.2
N$66: D5.C Q4.3
N$67: D4.C Q8.3
N$68: D6.C Q7.3
N$69: D7.C Q5.3
N$70: C40.1 IR1.P$2 R42.2
OUT: C12.1 C13.1 FB4.2 U3.5
P1_0: IC6.1 R41.2
P1_2: IC6.3 R40.2 SV1.7 SV1.P$7
RINPUT1: C1.2 IC1.5
SCL: D2.A R7.2 RPI1.5 RPI1.S5 SJ1.1 SJ3.2 SJ6.1 SJ8.1 SJ9.1 SV1.5 SV1.P$5
SDA: R6.2 RPI1.3 RPI1.S3 SJ2.1 SJ4.2 SJ5.1 SJ7.1 SJ10.1 SV1.3 SV1.P$3
SECURITY_RESET: IC8.9 R29.2 RPI1.31 RPI1.S31
SPI_CE1: RPI1.26 RPI1.S26
SPI_MISO: RPI1.21 RPI1.S21
SPK_LN: C14.1 FB5.2 SV1.6 SV1.P$6
SPK_LP: C11.1 FB3.2 SV1.8 SV1.P$8
SPK_RN: C22.1 FB7.2 SV1.2 SV1.P$2
SPK_RP: C23.1 FB8.2 SV1.4 SV1.P$4
TEMP_INT: IC4.P$3 IC6.2 R11.2
TFT_CS: RPI1.24 RPI1.S24 TFT1.18
TFT_DC: RPI1.22 RPI1.S22 TFT1.16
TFT_MOSI: RPI1.19 RPI1.S19 TFT1.21
TFT_RESET: IC2.1 IC3.2 R3.1 TFT1.20 TP3.P$1
TFT_SCLK: RPI1.23 RPI1.S23 TFT1.17
VMID: C28.1 C29.1 IC1.27